# Altium PCB PS.PcbDoc
Units mil, origin at the board's own origin, x right, y up, seen from the top; angles counter-clockwise.
Board outline 4640 x 2100 mil, 2 copper layers (Top Layer, Bottom Layer), stack 21 mil thick; 80 components, 41 nets, 196 pads, 334 vias.
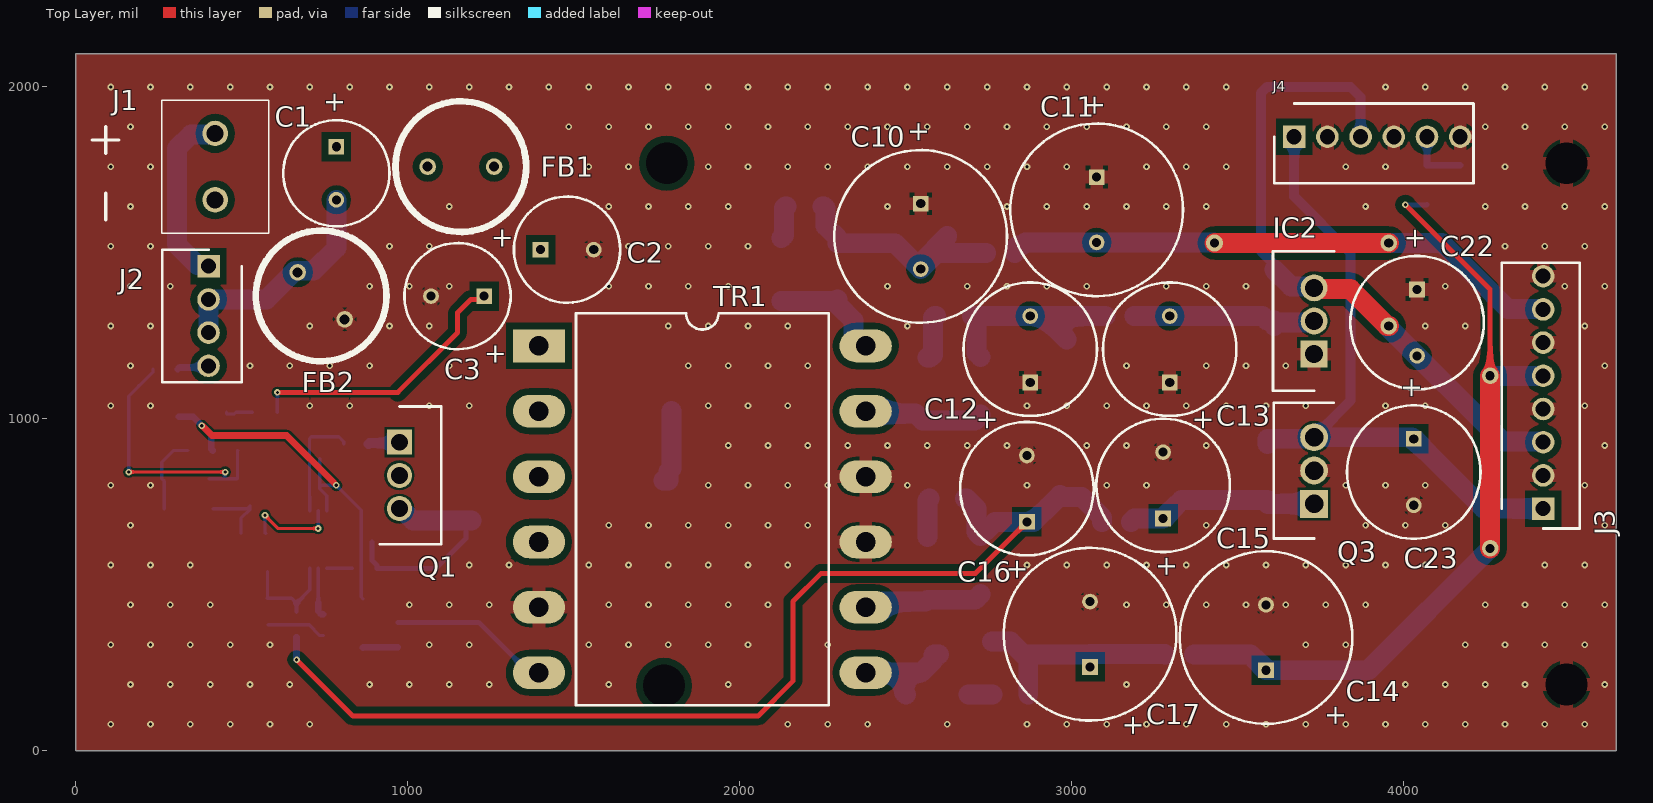
[diagram p0: Top Layer view]
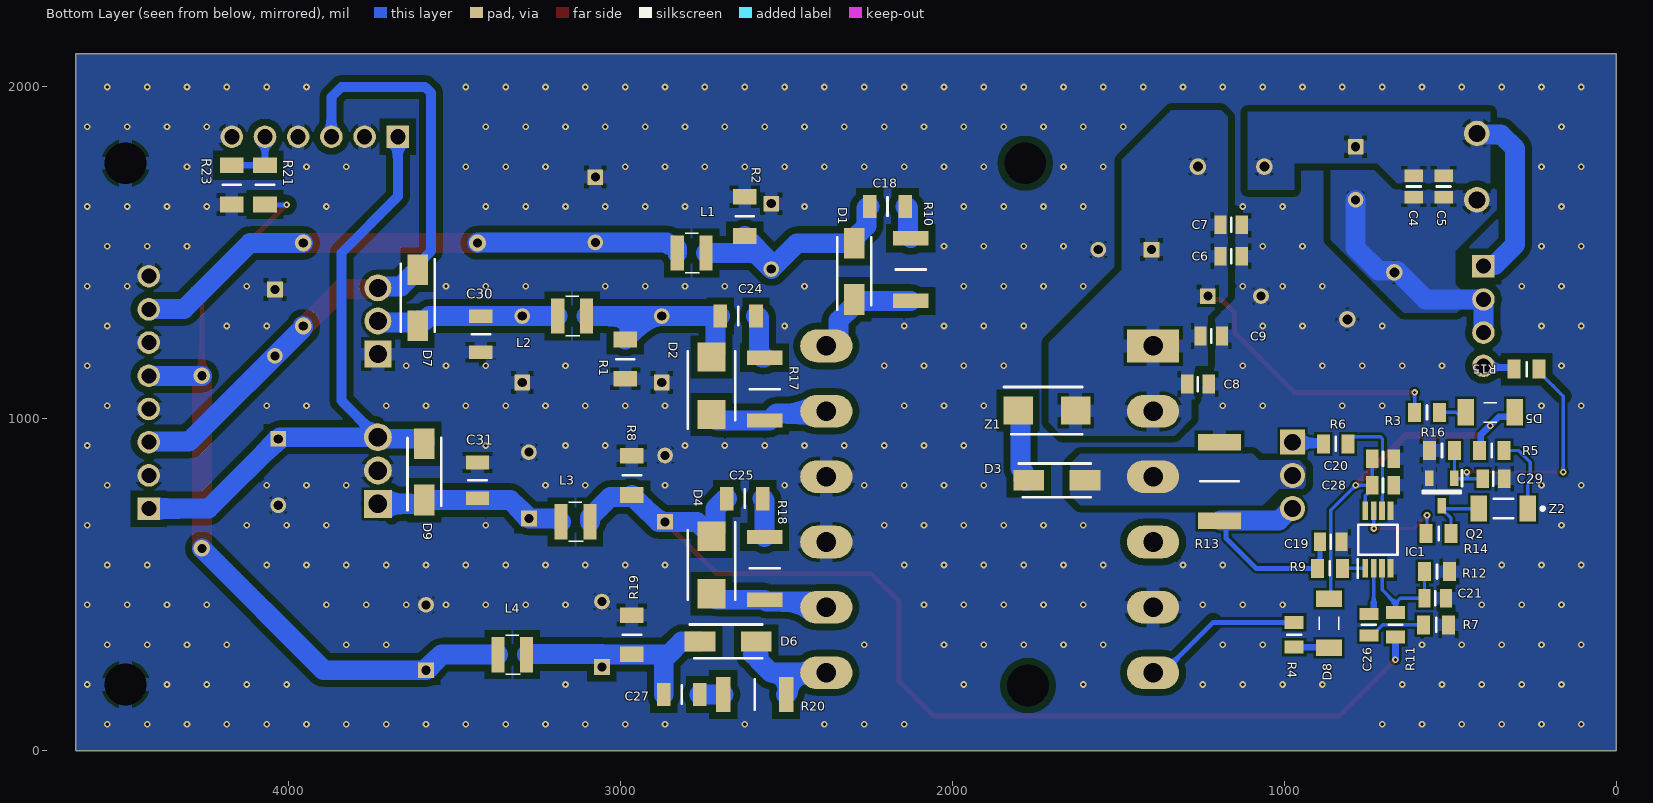
[diagram p1: Bottom Layer view, seen from below]
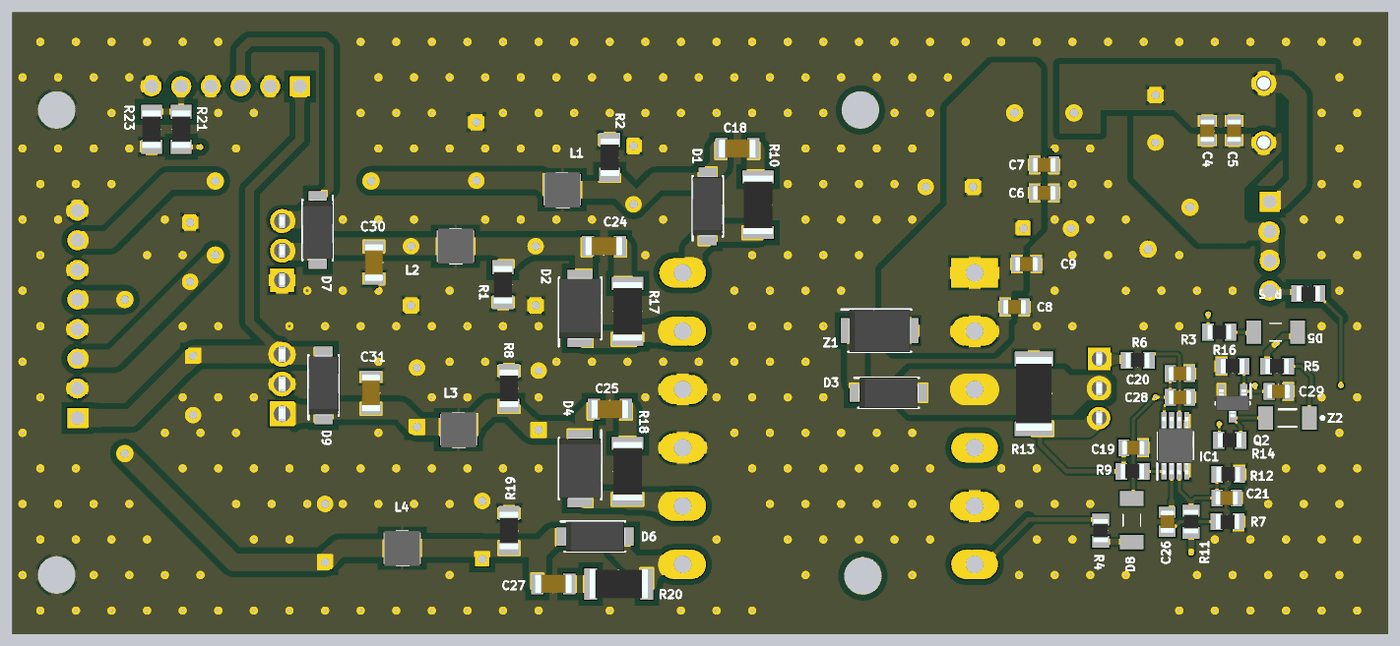
[diagram p2: 3D render of the assembled board from below, using the file's embedded part models]

## Layer stack, top to bottom
Top Solder: solder mask 0.4, Solder Resist, Dk 3.5
Top Layer: signal copper 1.4
Dielectric 2: prepreg 2.8, PP-006, Dk 4.1
Dielectric 1: dielectric 12.6, FR-4, Dk 4.8
Dielectric 3: prepreg 2.8, PP-006, Dk 4.1
Bottom Layer: signal copper 1.4
Bottom Solder: solder mask 0.4, Solder Resist, Dk 3.5

## Board outline
0,0 4640,0 4640,2100 0,2100

## Design rules (kind name [scope] priority, off if disabled: settings)
Clearance Clearance_1 [TouchesRoom('RoomIC1')OR(InComponent('IC2') OR InComponent('Q3'))] p1: gap=7 ignorepadtopadclearanceinfootprint=FALSE
Clearance Clearance_2 [WithinRoom('Room_control')] p2: gap=7 ignorepadtopadclearanceinfootprint=FALSE
Clearance [All] p3: gap=20 ignorepadtopadclearanceinfootprint=FALSE
ComponentClearance [All] p1: gap=0 collisioncheckmode=3 verticalgap=0 showdistances=FALSE
PolygonConnect SwitchNodePoly [InNet('NetD3_2')] p1: connectstyle=Direct reliefconductorwidth=40 reliefentries=4 polygonreliefangle="90 Angle" airgapwidth=10
PolygonConnect [All] p2: connectstyle=Relief reliefconductorwidth=40 reliefentries=4 polygonreliefangle="90 Angle" airgapwidth=10
RoomDefinition Room_control [InComponentClass('Components Class 1')] p1: confinementstyle=ConfineIn formatcopy=TRUE lockcomponents=FALSE outline 145,1135 185,1095 1190,1095 1305,980 1305,400 1050,145 255,145 75,325 75,1190 115,1230
RoomDefinition RoomIC1 [False] p2: confinementstyle=ConfineIn formatcopy=TRUE lockcomponents=FALSE outline 607.8,446.61 607.8,806.61 827.8,806.61 827.8,446.61
RoutingVias [All] p1: holewidth=10 width=20 viastyle="Through Hole" minholewidth=9.84 minwidth=19.68 maxholewidth=39.37 maxwidth=78.74
SolderMaskExpansion [All] p1: expansion=4 istentingtop=FALSE
Width W_Room [TouchesRoom('RoomIC1')] p1: maxlimit=10 minlimit=10 preferedwidth=10
Width [All] p2: maxlimit=100 minlimit=10 preferedwidth=20
29 further rules are at their usual default settings.

## Components (designator, comment, footprint, x,y, rotation, side; value= is the part's Value field where it differs from the comment)
C1 "CapPol" CapPol8mm 785,1740 r90 top value=10u
C2 "CapPol" CapPol8mm 1480,1510 r180 top value=10u
C3 "CapPol" CapPol8mm 1150,1370 r0 top value=10u
C4 "Capacitor_SMD" CAPC2012X140N 610,1700 r90 bottom value=4.7u
C5 "Capacitor_SMD" CAPC2012X140N 520,1700 r90 bottom value=4.7u
C6 "Capacitor_SMD" CAPC2012X140N 1160,1490 r0 bottom value=4.7u
C7 "Capacitor_SMD" CAPC2012X140N 1160,1585 r0 bottom value=4.7u
C8 "Capacitor_SMD" CAPC2012X140N 1260,1105 r0 bottom value=4.7u
C9 "Capacitor_SMD" CAPC2012X140N 1220,1250 r0 bottom value=4.7u
C10 "CapPol" Cap_pol_5x13 2545,1550 r90 top value=470u
C11 "CapPol" Cap_pol_5x13 3075,1630 r90 top value=470u
C12 "CapPol" CapPol_D10H16 2875,1210 r270 top value=470u
C13 "CapPol" CapPol_D10H16 3295,1210 r270 top value=470u
C14 "CapPol" Cap_pol_5x13 3585,341.57 r270 top value=470u
C15 "CapPol" CapPol_D10H16 3275,800 r270 top value=470u
C16 "CapPol" CapPol_D10H16 2865,790 r270 top value=470u
C17 "CapPol" Cap_pol_5x13 3055,351.57 r270 top value=470u
C18 "Capacitor_SMD" CAPC3216X95N 2195,1640 r180 bottom value=680n
C19 "Capacitor_SMD" CAPC2012X140N 860,630 r0 bottom value=100n
C20 "Capacitor_SMD" CAPC2012X140N 702.72,880 r0 bottom value=10u
C21 "Capacitor_SMD" CAPC2012X140N 545,460 r180 bottom value=100p
C22 "CapPol" CapPol_D10H16 4040,1290 r90 top value=10u
C23 "CapPol" CapPol_D10H16 4030,840 r90 top value=10u
C24 "Capacitor_SMD" CAPC3216X95N 2645,1310 r180 bottom value=680n
C25 "Capacitor_SMD" CAPC3216X95N 2625,760 r180 bottom value=680n
C26 "Capacitor_SMD" CAPC2012X140N 745,380 r90 bottom value=680n
C27 "Capacitor_SMD" CAPC3216X95N 2815,170 r0 bottom value=680n
C28 "Capacitor_SMD" CAPC2012X140N 702.72,800 r0 bottom value=100n
C29 "Capacitor_SMD" CAPC2012X140N 370,820 r0 bottom value=680n
C30 "Capacitor_SMD" CAPC3216X95N 3420,1255 r90 bottom value=4.7u
C31 "Capacitor_SMD" CAPC3216X95N 3430,815 r90 bottom value=4.7u
D1 "SS1200-LTP" DIOM5226X244N 2295,1444.65 r90 bottom
D2 "S2B-13-F" DIOM5336X250N 2725,1100 r90 bottom
D3 "SS1200-LTP" DIOM5226X244N 1685,815 r180 bottom
D4 "S2B-13-F" DIOM5336X250N 2725,560 r270 bottom
D5 "1N4148BUR" 1N4148BUR 380,1020 r0 bottom
D6 "SS1200-LTP" DIOM5226X244N 2675,330 r180 bottom
D7 "SS1200-LTP" DIOM5226X244N 3610,1365 r270 bottom
D8 "1N4148BUR" 1N4148BUR 865,385 r270 bottom
D9 "SS1200-LTP" DIOM5226X244N 3590,840.35 r90 bottom
FB1 "FR2" FB2 1060,1760 r0 top
FB2 "FR2" FB2 668.58,1441.42 r315 top
IC1 "LM3488MM_NOPB" SOP65P490X110-8N 717.8,636.61 r90 bottom
IC2 "KA7909TU" TO254P470X1016X2019-3P 3730,1195.2 r90 top
J1 "TB006-508-02BE" TB00650802BE 420,1760 r270 top
J2 "640456-4" SHDR4W66P0X254_1X4_1016X572X1041P 400,1460 r90 top
J3 "640456-8" SHDR8W66P0X254_1X8_2032X572X1024P 4420,730 r270 top
J4 "640456-6" SHDR6W66P0X254_1X6_1524X572X1003P 3670,1850 r180 top
L1 "Inductor" TYA3015150M 2785,1500 r90 bottom value=33uH
L2 "Inductor" TYA3015150M 3145,1310 r90 bottom value=33uH
L3 "Inductor" TYA3015150M 3135,690 r90 bottom value=33uH
L4 "Inductor" TYA3015150M 3325,290 r90 bottom value=33uH
Q1 "IRFZ44EPBF" TO254P469X1042X1967-3P 975,930 r270 top
Q2 "2N7002" SOT96P240X120-3N 525,780 r270 bottom
Q3 "L7809ACV" TO255P460X1020X2030-3P 3730,744.21 r90 top
R1 "Res_SMD" RESC3216X75N 2985,1180 r270 bottom value=1k
R2 "Res_SMD" RESC3216X75N 2625,1610 r90 bottom value=1k
R3 "Res_SMD" RESC2012X60N 570,1020 r0 bottom value=1k
R4 "Res_SMD" RESC2012X60N 970,350 r90 bottom value=1k
R5 "Res_SMD" RESC2012X60N 375,905 r0 bottom value=1k
R6 "Res_SMD" RESC2012X60N 845,925 r0 bottom value=1k
R7 "Res_SMD" RESC2012X60N 542.6,380 r0 bottom value=1k
R8 "Res_SMD" RESC3216X75N 2965,830 r270 bottom value=1k
R9 "Res_SMD" RESC2012X60N 862.4,550 r0 bottom value=1k
R10 "Res_SMD" RESC5025X65N 2125,1450 r270 bottom value=1k
R11 "Res_SMD" RESC2012X60N 665,380 r270 bottom value=1k
R12 "Res_SMD" RESC2012X60N 540,540 r0 bottom value=1k
R13 "Res_SMD" RESC6331X75N 1195,811.89 r270 bottom value=1k
R14 "Res_SMD" RESC2012X60N 535,655 r0 bottom value=1k
R15 "Res_SMD" RESC2012X60N 270,1150 r180 bottom value=1k
R16 "Res_SMD" RESC2012X60N 525,905 r180 bottom value=1k
R17 "Res_SMD" RESC5025X65N 2565,1090 r270 bottom value=1k
R18 "Res_SMD" RESC5025X65N 2565,550 r270 bottom value=1k
R19 "Res_SMD" RESC3216X75N 2965,350 r270 bottom value=1k
R20 "Res_SMD" RESC5025X65N 2595,170 r180 bottom value=1k
R21 "Res_SMD" RESC3216X75N 4070,1705 r270 bottom value=1k
R23 "Res_SMD" RESC3216X75N 4170,1705 r270 bottom value=1k
TR1 "Transformer 12pin30.15.7" TRAFO5MMX25MM12PCS 1395,1220 r0 top
Z1 "1SMB5932BT3G" DIOM5436X247N 1715,1025 r180 bottom
Z2 "Zener" SOD-80 340,730 r0 bottom value=6.8

## Footprints (in the part's own frame and the unit in brackets; to place one, negate y for a bottom-side part, rotate by r counter-clockwise, add the part's x,y. Pads: shape width x height; smd on the part's side, far side on the other; paste and mask are expansions set on the pad)
1N4148BUR [mm]
  rect 1.25x2 smd: 1(-1.875,0) 2(1.875,0)
  silkscreen extent -0.5,-0.75 0.5,0.75
Cap_pol_5x13 [mm] "polarized electrolytic capacitor with 5mm legs spacing"
  rect 1.2x1.2 hole 0.7: 1(2.5,0)
  round 1.2 hole 0.7: 2(-2.5,0)
  silkscreen extent -6.6,-6.6 6.6,6.6
CAPC2012X140N [mm]
  rect 0.94x1.43 smd: 1(-0.82,0) 2(0.82,0)
  silkscreen extent 0,-0.53 0,0.53, body extent -1,-0.63 1,0.63, height 1.4
CAPC3216X95N [mm]
  rect 1.04x1.78 smd: 1(-1.37,0) 2(1.37,0)
  silkscreen extent 0,-0.7 0,0.7, body extent -1.6,-0.8 1.6,0.8, height 0.95
CapPol8mm [mm] "4mm pin spacing 8mm diameter"
  rect 1.2x1.2 hole 0.7: 1(2.032,0)
  round 1.2 hole 0.7: 2(-2.032,0)
  silkscreen extent -4.06,-4.06 4.06,4.06
CapPol_D10H16 [mm] "THT capacitor electrolytic"
  rect 1.2x1.2 hole 0.7: 1(2.54,0)
  round 1.2 hole 0.7: 2(-2.54,0)
  silkscreen extent -5.1,-5.11 5.1,5.11
DIOM5226X244N [mm]
  rect 2.35x1.55 smd: 1(-2.15,0) 2(2.15,0)
  silkscreen extent -2.93,-1.29 2.6,1.29, body extent -2.6,-1.29 2.6,1.29, height 2.44
DIOM5336X250N [mm]
  rect 2.25x2.15 smd: 1(-2.2,0) 2(2.2,0)
  silkscreen extent -3.27,-1.81 2.65,1.81, body extent -2.65,-1.81 2.65,1.81, height 2.5
DIOM5436X247N [mm]
  rect 2.25x2.15 smd: 1(-2.2,0) 2(2.2,0)
  silkscreen extent -3.27,-1.81 2.7,1.81, body extent -2.7,-1.81 2.7,1.81, height 2.47
FB2 [mil]
  round 50 hole 30: 1(0,0) 2(200,0)
  silkscreen extent -97,-197 297,197
RESC2012X60N [mm]
  rect 1x1.45 smd: 1(-0.95,0) 2(0.95,0)
  silkscreen extent 0,-0.53 0,0.53, body extent -1,-0.63 1,0.63, height 0.6
RESC3216X75N [mm]
  rect 1.2x1.8 smd: 1(-1.5,0) 2(1.5,0)
  silkscreen extent 0,-0.7 0,0.7, body extent -1.6,-0.8 1.6,0.8, height 0.75
RESC5025X65N [mm]
  rect 1.1x2.7 smd: 1(-2.4,0) 2(2.4,0)
  silkscreen extent 0,-1.15 0,1.15, body extent -2.5,-1.25 2.5,1.25, height 0.65
RESC6331X75N [mm]
  rect 1.25x3.3 smd: 1(-3,0) 2(3,0)
  silkscreen extent 0,-1.45 0,1.45, body extent -3.15,-1.55 3.15,1.55, height 0.75
SHDR4W66P0X254_1X4_1016X572X1041P [mm]
  rect 1.725x1.725 hole 1.15: 1(0,0)
  round 1.725 hole 1.15: 2(-2.54,0) 3(-5.08,0) 4(-7.62,0)
  silkscreen extent -8.89,-2.54 1.27,3.56, body extent -8.86,-2.7 1.3,3.14, height 10.03
SHDR6W66P0X254_1X6_1524X572X1003P [mm]
  rect 1.725x1.725 hole 1.15: 1(0,0)
  round 1.725 hole 1.15: 2(-2.54,0) 3(-5.08,0) 4(-7.62,0) 5(-10.16,0) 6(-12.7,0)
  silkscreen extent -13.72,-2.54 1.52,3.56, body extent -13.98,-2.76 1.26,3.08, height 10.03
SHDR8W66P0X254_1X8_2032X572X1024P [mm]
  rect 1.725x1.725 hole 1.15: 1(0,0)
  round 1.725 hole 1.15: 2(-2.54,0) 3(-5.08,0) 4(-7.62,0) 5(-10.16,0) 6(-12.7,0) 7(-15.24,0) 8(-17.78,0)
  silkscreen extent -18.8,-3.17 1.52,2.8, body extent -19.03,-2.65 1.29,3.19, height 10.03
SOD-80 [mm]
  rect 1.25x2 smd: 1(-1.875,0) 2(1.875,0)
  silkscreen extent -3.12,-0.75 0.75,0.75
SOP65P490X110-8N [mm]
  rect 1.4x0.45 smd: 1(-2.2,0.975) 2(-2.2,0.325) 3(-2.2,-0.325) 4(-2.2,-0.975) 5(2.2,-0.975) 6(2.2,-0.325) 7(2.2,0.325) 8(2.2,0.975)
  silkscreen extent -2.9,-1.5 1.15,1.55, body extent -2.45,-1.5 2.45,1.5, height 1.1
SOT96P240X120-3N [mm]
  rect 1.2x0.65 smd: 1(-1.05,0.96) 2(-1.05,-0.96) 3(1.05,0)
  silkscreen extent -1.65,-1.45 0.1,1.54, body extent -1.2,-1.45 1.2,1.45, height 1.2
TB00650802BE [mm]
  round 1.95 hole 1.3: 1(-2.54,0) 2(2.54,0)
  silkscreen extent -5.08,-4.1 5.08,4.1, body extent -5.08,-4.1 5.08,4.1, height 10.5
TO254P469X1042X1967-3P [mm]
  rect 1.92x1.92 hole 1.28: 1(0,0)
  round 1.92 hole 1.28: 2(2.54,0) 3(5.08,0)
  silkscreen extent -2.73,-1.5 7.81,3.19, body extent -2.67,-1.5 7.75,3.19, height 18.84
TO254P470X1016X2019-3P [mm]
  rect 2.055x2.055 hole 1.37: 1(0,0)
  round 2.055 hole 1.37: 2(2.535,0) 3(5.07,0)
  silkscreen extent -2.8,-1.55 7.87,3.15, body extent -2.55,-1.55 7.61,3.15, height 18.54
TO255P460X1020X2030-3P [mm]
  rect 2.13x2.13 hole 1.42: 1(0,0)
  round 2.13 hole 1.42: 2(2.55,0) 3(5.1,0)
  silkscreen extent -2.65,-1.5 7.75,3.1, body extent -2.55,-1.5 7.65,3.1, height 19.4
TRAFO5MMX25MM12PCS [mm]
  rect 4x2.5 hole 1.5: 1(0,0)
  oval 4x2.5 hole 1.5: 2(0,-5) 3(0,-10) 4(0,-15) 5(0,-20) 6(0,-25) 7(25,-25) 8(25,-20) 9(25,-15) 10(25,-10) 11(25,-5) 12(25,0)
  silkscreen extent 2.83,-27.5 22.17,2.5
TYA3015150M [mm]
  rect 2.7x1 smd: 1(0,-1.1) 2(0,1.1)
  silkscreen extent -1.5,-0.6 1.5,0.5, body extent -1.5,-1.5 1.5,1.5, height 1.4

## Part data
C1 C2 C3 C10 C11 C12 C13 C14 C15 C16 C17 C22 C23: "Capacitor polarized electrolytic", Manufacturer_Name=TDK, Manufacturer_Part_Number=B43640A9477M, Mouser Part Number=871-B43640A9477M, Datasheet Link=https://componentsearchengine.com/Datasheets/1/B43640A9477M.pdf, Height=52mm
C4 C5 C6 C7 C8 C9 C18 C19 C20 C21 C24 C25 C26 C27 C28 C29 C30 C31: "Capacitor smd ceramic", Manufacturer_Name=TDK, Manufacturer_Part_Number=C3216C0G1H562J060AA, Datasheet Link=https://product.tdk.com/info/en/catalog/datasheets/mlcc_commercial_midvoltage_en.pdf, Height=0.75mm
D1 D3 D6 D7 D9: "Diode", Manufacturer_Name="Micro Commercial Components (MCC)", Mouser Part Number=833-SS1200-LTP, Arrow Part Number=SS1200-LTP, Arrow Price/Stock=https://www.arrow.com/en/products/ss1200-ltp/micro-commercial-components, Datasheet Link=http://www.mouser.com/ds/2/258/SS1150-L-SS1200-L(DO-214AC)-272760.pdf, Height=2.44mm, Manufacturer_Part_Number=SS1200-LTP, Mouser Price/Stock=https://www.mouser.co.uk/ProductDetail/Micro-Commercial-Components-MCC/SS1200-LTP?qs=O1HRStiETChHpHSSFKYx%252Bg%3D%3D
D2 D4: "Diode", Manufacturer_Name="Diodes Inc.", Mouser Part Number=621-S2B-F, Arrow Part Number=S2B-13-F, Arrow Price/Stock=https://www.arrow.com/en/products/s2b-13-f/diodes-incorporated, Datasheet Link=https://www.diodes.com/assets/Datasheets/ds16004.pdf, Height=2.5mm, Manufacturer_Part_Number=S2B-13-F, Mouser Price/Stock=https://www.mouser.com/Search/Refine.aspx?Keyword=621-S2B-F
D5 D8: "Diode", Manufacturer_Name=Vishay, Datasheet Link=https://www.mouser.com/datasheet/2/427/ll4148-1767723.pdf, Height=1.6mm, Manufacturer_Part_Number=1N4148BUR
FB1 FB2: "THT ferrite bead"
IC1: "Integrated Circuit", Arrow Part Number=LM3488MM/NOPB, Manufacturer_Name="Texas Instruments", Mouser Part Number=926-LM3488MM/NOPB, Arrow Price/Stock=https://www.arrow.com/en/products/lm3488mmnopb/texas-instruments, Datasheet Link=https://www.ti.com/lit/ds/symlink/lm3488.pdf?HQS=TI-null-null-mousermode-df-pf-null-wwe&ts=1601467154043&ref_url=https%253A%252F%252Fwww.mouser.in%252F, Height=1.1mm, Manufacturer_Part_Number=LM3488MM/NOPB, Mouser Price/Stock=https://www.mouser.co.uk/ProductDetail/Texas-Instruments/LM3488MM-NOPB?qs=X1J7HmVL2ZHi%252BCD2w7rKZg%3D%3D
IC2: "Integrated Circuit", Manufacturer_Name="ON Semiconductor", Mouser Part Number=512-KA7909TU, Datasheet Link=https://docs-emea.rs-online.com/webdocs/14a6/0900766b814a6786.pdf, Height=4.7mm, Manufacturer_Part_Number=KA7909TU, Mouser Price/Stock=https://www.mouser.com/Search/Refine.aspx?Keyword=512-KA7909TU
J1: "Connector", Manufacturer_Name="CUI Devices", Mouser Part Number=490-TB006-508-02BE, Arrow Part Number=TB006-508-02BE, Arrow Price/Stock=https://www.arrow.com/en/products/tb006-508-02be/cui-devices, Datasheet Link=https://www.mouser.com/datasheet/2/670/tb006-508-1550645.pdf, Height=10.4mm, Manufacturer_Part_Number=TB006-508-02BE, Mouser Price/Stock=https://www.mouser.co.uk/ProductDetail/CUI-Devices/TB006-508-02BE?qs=vLWxofP3U2wEdOVV%2FaT04w%3D%3D
J2: "Connector", Manufacturer_Name="TE Connectivity", Mouser Part Number=571-6404564, Arrow Part Number=640456-4, Arrow Price/Stock=https://www.arrow.com/en/products/640456-4/te-connectivity, Datasheet Link=http://www.te.com/commerce/DocumentDelivery/DDEController?Action=showdoc&DocId=Customer+Drawing%7F640456%7FW3%7Fpdf%7FEnglish%7FENG_CD_640456_W3.pdf%7F640456-4, Height=10.414mm, Manufacturer_Part_Number=640456-4, Mouser Price/Stock=https://www.mouser.co.uk/ProductDetail/TE-Connectivity-AMP/640456-4?qs=%2F35zJ5USjokX5rl%252BbVBc4g%3D%3D, System=Connector
J3: "Connector", Manufacturer_Name="TE Connectivity", Mouser Part Number=571-6404568, Arrow Part Number=640456-8, Arrow Price/Stock=https://www.arrow.com/en/products/640456-8/te-connectivity, Datasheet Link=http://docs-emea.rs-online.com/webdocs/13e2/0900766b813e2516.pdf, Height=10.236mm, Manufacturer_Part_Number=640456-8, Mouser Price/Stock=https://www.mouser.co.uk/ProductDetail/TE-Connectivity-AMP/640456-8?qs=%2F35zJ5USjomho1287DA4QA%3D%3D, System=Connector
J4: "Connector", Manufacturer_Name="TE Connectivity", Mouser Part Number=571-6404566, Arrow Part Number=640456-6, Arrow Price/Stock=https://www.arrow.com/en/products/640456-6/te-connectivity, Datasheet Link=https://www.mouser.com/ProductDetail/TE-Connectivity/640456-6?qs=%2F35zJ5USjomb%252bGgX%252bBnrrQ%3D%3D&gclid=CjwKCAjwkoz7BRBPEiwAeKw3q0mcLif-2aBBbbX-TwuIeMidB_ARULgbAE-SJPQzeNro84r-4lxoHhoCr1IQAvD_BwE, Height=10.033mm, Manufacturer_Part_Number=640456-6, Mouser Price/Stock=https://www.mouser.co.uk/ProductDetail/TE-Connectivity-AMP/640456-6?qs=%2F35zJ5USjomb%252BGgX%252BBnrrQ%3D%3D, System=Connector
Q1: "MOSFET (N-Channel)", Manufacturer_Name=Infineon, Mouser Part Number=942-IRFZ44EPBF, Arrow Part Number=IRFZ44EPBF, Arrow Price/Stock=https://www.arrow.com/en/products/irfz44epbf/infineon-technologies-ag, Datasheet Link=https://componentsearchengine.com/Datasheets/2/IRFZ44EPBF.pdf, Height=4.69mm, Manufacturer_Part_Number=IRFZ44EPBF, Mouser Price/Stock=https://www.mouser.co.uk/ProductDetail/Infineon-IR/IRFZ44EPBF?qs=9%252BKlkBgLFf00d8QrWy3wMA%3D%3D
Q2: "MOSFET (N-Channel)", Manufacturer_Name=Vishay, Mouser Part Number=781-2N7002, Datasheet Link=https://www.diodes.com/assets/Datasheets/ds11303.pdf, Height=1.2mm, Manufacturer_Part_Number=2N7002, Mouser Price/Stock=https://www.mouser.co.uk/ProductDetail/Vishay-Siliconix/2N7002?qs=xBpwZ0JX2zKeuvZKtdYLZQ%3D%3D
Q3: "Transistor", Manufacturer_Name=STMicroelectronics, Mouser Part Number=511-L7809ACV, Datasheet Link=https://componentsearchengine.com/Datasheets/1/L7809ACV.pdf, Height=4.6mm, Manufacturer_Part_Number=L7809ACV, Mouser Price/Stock=https://www.mouser.co.uk/ProductDetail/STMicroelectronics/L7809ACV/?qs=arR7071FstcIsO2ME7JR7Q%3D%3D
R1 R2 R3 R4 R5 R6 R7 R8 R9 R10 R11 R12 R13 R14 R15 R16 R17 R18 R19 R20 R21 R23: "Resistor SMD", Arrow Part Number=CR1206-FW-1504ELF, Manufacturer_Name=Bourns, Mouser Part Number=652-CR1206FW1504ELF, Arrow Price/Stock=https://www.arrow.com/en/products/cr1206-fw-1504elf/bourns, Datasheet Link=http://componentsearchengine.com/Datasheets/1/CR1206-FW-1504ELF.pdf, Height=0.75mm, Manufacturer_Part_Number=CR1206-FW-1504ELF, Mouser Price/Stock=https://www.mouser.co.uk/ProductDetail/Bourns/CR1206-FW-1504ELF/?qs=6oMev5NRZMFfvXkOpYL2%252BA%3D%3D
TR1: "Transformer EE 30x15x7 WxHxL 12pin"
Z1: "Zener Diode", Manufacturer_Name="ON Semiconductor", Mouser Part Number=863-1SMB5932BT3G, Arrow Part Number=1SMB5932BT3G, Arrow Price/Stock=https://www.arrow.com/en/products/1smb5932bt3g/on-semiconductor, Datasheet Link=http://www.onsemi.com/pub/Collateral/1SMB5913BT3-D.PDF, Height=2.47mm, Manufacturer_Part_Number=1SMB5932BT3G, Mouser Price/Stock=https://www.mouser.co.uk/ProductDetail/ON-Semiconductor/1SMB5932BT3G?qs=vLkC5FC1VN%2Fm4oZo18auNg%3D%3D
Z2: "Zener Diode", Manufacturer_Name=Vishay, Manufacturer_Part_Number=GLL4739-E3/97, Mouser Part Number=78-GLL4739-E3/97, Datasheet Link=https://hu.mouser.com/datasheet/2/427/gll4735-1767862.pdf, Height=2.67mm, Mouser Price/Stock=https://www.mouser.com/Search/Refine.aspx?Keyword=78-GLL4739-E3%2F97
L1 L2 L3 L4: Code_IEC=1005, Code_JEITA=0402, LatestRevisionDate=29-May-2009, LatestRevisionNote="IPC-7351 Footprint Added.", PackageDescription="Chip Inductor", PackageReference=0402-A, Published=8-Jun-2000, Publisher="Altium Limited"

## Free pads (board coordinates)
  round 0 hole 125.98: 2(1780,1770) 3(1771.65,196.85) 5(4490,200) 5(4490,1770)

## Via types
v1: diameter 20, hole 10, Top Layer to Bottom Layer, 324 vias
v2: diameter 50, hole 28, Top Layer to Bottom Layer, 5 vias
v3: diameter 19.68, hole 9.84, Top Layer to Bottom Layer, 5 vias

## Nets (pads, with @x,y where several pads share a name; then routed paths per layer and width w, separated by ;. In a path a pad name is that pad's centre, name@x,y a point inside that pad or via, vN(x,y) a via of type N, cw(c..) or ccw(c..) an arc to the next point about the centre after c; other vN are vias at no path point)
GND: C2.2 C3.2 C6.1 C7.1 C8.1 C9.1 C10.1 C11.1 C12.1 C13.1 C14.2 C15.2 C16.2 C17.2 C19.1 C20.1 C21.2 C22.1 C23.2 C28.1 C29.1 C30.1 C31.2 FB2.2 IC1.4 IC1.5 IC2.1 J3.2 J3.4 J3.6 J3.8 J4.2 J4.4 J4.6 pad.5 Q2.2 Q3.2 R1.2 R2.2 R7.1 R8.1 R12.1 R13.1 R16.1 R19.1 R23.2 TR1.5 TR1.9 TR1.10
  other v1: 105,80 225,80 345,80 465,80 585,80 705,80 2145,80 2265,80 2385,80 2625,80 2865,80 2985,80 3105,80 3225,80 3345,80 3465,80 3585,80 3705,80 3825,80 3945,80 4065,80 4185,80 4305,80 4425,80 4545,80 165,200 285,200 405,200 525,200 645,200 885,200 1005,200 1125,200 1245,200 1605,200 1965,200 3165,200 4005,200 4125,200 4245,200 4365,200 4605,200 105,320 225,320 345,320 465,320 585,320 1065,320 1185,320 1545,320 1665,320 1785,320 1905,320 2025,320 2265,320 3705,320 3825,320 4185,320 4305,320 4425,320 4545,320 165,440 285,440 405,440 1005,440 1125,440 1245,440 1605,440 1725,440 1845,440 1965,440 2085,440 3165,440 3285,440 3405,440 3525,440 3645,440 3765,440 3885,440 4245,440 4365,440 4485,440 4605,440 105,560 225,560 345,560 1185,560 1305,560 1545,560 1665,560 1785,560 1905,560 2025,560 2145,560 2865,560 2985,560 3105,560 3225,560 3345,560 3465,560 3585,560 3705,560 3825,560 3945,560 4065,560 4425,560 4545,560 165,680 1605,680 1725,680 1845,680 1965,680 2085,680 2205,680 3405,680 3885,680 4005,680 4125,680 4605,680 105,800 225,800 1905,800 2025,800 2145,800 2265,800 2505,800 2865,800 3105,800 3225,800 3825,800 3945,800 4065,800 4545,800 1965,920 2085,920 2205,920 2325,920 2445,920 2565,920 2685,920 2805,920 3045,920 3165,920 3405,920 4605,920 105,1040 225,1040 705,1040 825,1040 1065,1040 1185,1040 1905,1040 2025,1040 2145,1040 2865,1040 2985,1040 3105,1040 3225,1040 3345,1040 3465,1040 3585,1040 3705,1040 3945,1040 4065,1040 4545,1040 165,1160 525,1160 645,1160 765,1160 885,1160 1125,1160 1845,1160 1965,1160 2085,1160 2205,1160 3165,1160 3405,1160 3525,1160 3645,1160 4605,1160 105,1280 225,1280 705,1280 945,1280 1065,1280 1785,1280 1905,1280 2025,1280 2145,1280 2505,1280 4065,1280 4185,1280 4545,1280 165,1400 285,1400 885,1400 1005,1400 1125,1400 1605,1400 1725,1400 1845,1400 1965,1400 2445,1400 2685,1400 2805,1400 2925,1400 3045,1400 3285,1400 3405,1400 3525,1400 4125,1400 4485,1400 4605,1400 105,1520 225,1520 945,1520 1065,1520 1665,1520 1785,1520 1905,1520 2025,1520 4305,1520 4425,1520 4545,1520 165,1640 1005,1640 1125,1640 1605,1640 1725,1640 1845,1640 1965,1640 2445,1640 2805,1640 2925,1640 3045,1640 3165,1640 3285,1640 3405,1640 3885,1640 4245,1640 4365,1640 4485,1640 4605,1640 105,1760 225,1760 1545,1760 1665,1760 1905,1760 2025,1760 2145,1760 2265,1760 2385,1760 2505,1760 2625,1760 2745,1760 2865,1760 2985,1760 3225,1760 3345,1760 3465,1760 3825,1760 3945,1760 4305,1760 165,1880 1485,1880 1605,1880 1725,1880 1845,1880 1965,1880 2085,1880 2205,1880 2325,1880 2445,1880 2565,1880 2685,1880 2805,1880 2925,1880 3045,1880 3165,1880 3285,1880 3405,1880 4245,1880 4365,1880 4485,1880 4605,1880 105,2000 225,2000 345,2000 465,2000 585,2000 705,2000 825,2000 945,2000 1065,2000 1185,2000 1305,2000 1425,2000 1545,2000 1665,2000 1785,2000 1905,2000 2025,2000 2145,2000 2265,2000 2385,2000 2505,2000 2625,2000 2745,2000 2865,2000 2985,2000 3105,2000 3225,2000 3345,2000 3465,2000 3945,2000 4065,2000 4185,2000 4305,2000 4425,2000 4545,2000
NetC1_1: C1.1 C4.2 C5.2 FB1.1 J1.1 J2.1 | length 545.4
  Bottom Layer w60: J2.1 396.04,1463.96 366.04,1463.96 305.15,1524.85 305.15,1815.15 346.79,1856.79 416.79,1856.79 J1.1
NetC1_2: C1.2 C4.1 C5.1 FB2.1 J1.2 J2.2 J2.3 | length 694.2
  Bottom Layer w60: J2.3 J2.2 573.93,1360 660.3,1446.37 668.58,1446.37 716.37,1446.37 785,1515 C1.2
NetC10_2: C10.2 C18.1 D1.2 L1.1 R2.1 | length 763.9
  Bottom Layer w60: C18.1 2253.43,1640 2258.46,1634.96 2258.46,1581.57 2295,1545.04 D1.2 2467.28,1529.29 C10.2 ; R2.1 2625,1550 2545,1470 C10.2 ; L1.1 2593.43,1500 C10.2
NetC12_2: C12.2 C24.1 D2.2 L2.1 R1.1 | length 635
  Bottom Layer w60: C24.1 C24.1@2703.43,1310 ; D2.2 2712.68,1198.94 2712.68,1300.75 C24.1@2703.43,1310 ; R1.1 2985,1240 2915,1310 ; L2.1 2915,1310 ; C24.1@2703.43,1310 C12.2 2915,1310
NetC17_1: C17.1 C27.2 D6.1 L4.1 R19.2 | length 667
  Bottom Layer w60: D6.1 2760.16,329.49 2815.51,329.49 2855,290 ; C27.2 2868.94,276.06 2855,290 ; R19.2 R19.2@2965.94,290 ; L4.1 3280.12,291.57 3055,291.57 3053.43,290 R19.2@2965.94,290 ; 2855,290 R19.2@2965.94,290
NetC18_2: C18.2 R10.1 | length 103.9
  Bottom Layer w60: R10.1 2133.03,1552.52 2133.03,1634.96 2138.07,1640 C18.2
NetC19_2: C19.2 Q1.3 R9.2 R13.2 | length 687
  Bottom Layer w15: C19.2 892.28,573.98 907.4,558.86 907.4,550 1085,550 1175,640 1175,676.67 1192.11,693.78 R13.2
  Bottom Layer w60: Q1.3 979.22,730 1015.44,693.78 R13.2@1192.11,693.78
NetC21_1: C21.1 IC1.3 R11.1 R12.2 | length 323.1
  Bottom Layer w10: R12.2 577.4,460.12 C21.1 607.8,460 650,460 663.39,446.61 665,445 R11.1 ; 666.61,446.61 705,485 IC1.3
  Bottom Layer w20: 665,445 666.61,446.61
NetC24_2: C24.2 R17.1 | length 143.7
  Bottom Layer w60: R17.1 2573.19,1184.49 2581.54,1192.83 2581.54,1304.96 2586.57,1310 C24.2
NetC25_2: C25.2 R18.1 | length 118.6
  Bottom Layer w60: R18.1 2565,754.96 2570.04,760 C25.2
NetC26_1: C26.1 R7.2 | length 178.4
  Bottom Layer w10: R7.2 703.07,380 735.35,347.72 C26.1
NetC26_2: C26.2 IC1.2 | length 147.1
  Bottom Layer w10: 730.59,446.61 IC1.2
  Bottom Layer w20: 730.59,446.61 730.59,420.79 739.09,412.28 C26.2
NetC27_1: C27.1 R20.1 | length 71.6
  Bottom Layer w60: R20.1 C27.1
NetC29_2: C29.2 Q2.1 R15.2 R16.2 | length 823.3
  Top Layer w10: v1(160,840) v1(450,840)
  Bottom Layer w10: v1(160,840) 160,1068.54 190,1098.54 ; 190,1100 190,1098.54 ; R15.2 232.6,1141.14 190,1098.54 ; C29.2 444.07,820 ; v1(450,840) 448.09,838.09 448.09,824.01 444.07,820 ; R16.2 487.2,904.61 Q2.1 485.87,820 444.07,820
NetD1_1: D1.1 R10.2 TR1.12 | length 356.3
  Bottom Layer w60: R10.2 2294.49,1355.51 D1.1@2295,1356.02 ; D1.1 D1.1@2295,1356.02 ; TR1.12 2360.12,1220 2342.37,1237.75 2342.37,1296.88 2295,1344.25 D1.1@2295,1356.02
NetD2_1: D2.1 R17.2 TR1.11 | length 365.9
  Bottom Layer w60: TR1.11@2379.37,1023.27 TR1.11 2386.6,1015.8 2529.91,1015.8 2550.2,995.51 R17.2 2709.09,995.51 2725,1011.42 D2.1
NetD3_1: D3.1 Z1.1 | length 228.3
  Bottom Layer w60: D3.1 1785.39,815 1785.91,815.51 1785.91,841.56 1795,850.66 Z1.1@1795,1023.54
NetD3_2: D3.2 Q1.2 TR1.3
NetD4_2: D4.2 R18.2 TR1.8 | length 363.8
  Bottom Layer w60: TR1.8 2386.6,439.95 2443.3,439.95 2453.35,450 2559.49,450 R18.2 2709.09,455.51 2725,471.42 D4.2
NetD5_2: D5.2 R3.1 | length 85.9
  Bottom Layer w10: D5.2 453.82,1015 478.17,1015 483.17,1020 R3.1
NetD6_2: D6.2 R20.2 TR1.7 | length 320.8
  Bottom Layer w60: TR1.7 2495,235.75 ; R20.2 2495,175.51 2495,235.75 ; 2600.35,290 2584.61,290 2584.09,289.49 2584.09,273.74 2546.1,235.75 2495,235.75
NetD8_2: D8.2 R4.1 | length 105.6
  Bottom Layer w20: D8.2 865.71,311.89 969.29,311.89 R4.1
NetIC1_1: IC1.1 R9.1 | length 76.4
  Bottom Layer w10: IC1.1 R9.1@832.6,550
NetIC1_6: IC1.6 R6.1 | length 336.4
  Bottom Layer w10: IC1.6 705,766.38 704.14,767.23 704.14,806.61 704.14,940.57 710,946.43 792.91,946.43 807.6,931.74 R6.1
NetIC1_7: IC1.7 R14.2 | length 286
  Top Layer w10: v3(570,710) 610,670 v3(730,670)
  Bottom Layer w10: v3(570,710) 570,657.4 R14.2 ; v3(730,670) 730.3,670.3 730.3,722.93 IC1.7
NetJ2_4: J2.4 R15.1 | length 96.7
  Bottom Layer w20: R15.1 312.4,1155 395,1155 J2.4
NetJ4_5: J4.5 R21.1 R23.1 | length 185.9
  Bottom Layer w20: J4.5 R21.1 R23.1
NetQ1_1: Q1.1 R6.2 | length 94.7
  Bottom Layer w30: R6.2 884.9,927.5 972.5,927.5 Q1.1
NetQ2_3: Q2.3 R14.1 Z2.2 | length 209.4
  Bottom Layer w10: Z2.2 517.2,730 Q2.3@525,737.8 ; R14.1 497.6,700.43 525,727.83 Q2.3@525,737.8 ; Q2.3 Q2.3@525,737.8
NetR4_2: R4.2 TR1.6 | length 487.8
  Bottom Layer w15: R4.2 1213.82,387.4 1365.47,235.75 TR1.6
NetR5_1: R5.1 Z2.1 | length 235.4
  Bottom Layer w10: Z2.1 266.18,813.24 259.14,820.28 259.14,869.14 295,905 R5.1
V9+: C23.1 D9.2 J3.1 J4.1 Q3.3 | length 1957.1
  Bottom Layer w30: J4.1 3670,1670 3840,1500 3840,1055 Q3.3
  Bottom Layer w60: D9.2 3590,939.92 3590.51,940.43 3725.44,940.43 Q3.3 4025,945 C23.1 4240,730 J3.1
V9-: C22.2 D7.1 IC2.3 J3.3 J4.3 | length 2019.6
  Top Layer w60: IC2.3 3734,1390.8 3839.2,1390.8 3950,1280 v2(3955,1280)
  Bottom Layer w30: D7.1 3610,1465.39 3570,1505.39 3570,1982.43 3587.57,2000 3840,2000 3870,1970 J4.3
  Bottom Layer w60: D7.1 3660.84,1398.8 IC2.3@3734,1398.8 ; v2(3955,1280) 3955,1275 4298.49,931.51 4418.49,931.51 J3.3
V12+: C15.1 C31.1 D9.1 L3.2 Q3.1 | length 589.8
  Bottom Layer w60: L3.2 3188.31,700 C15.1 3330.71,755.71 3589.49,755.71 3590,755.2 3590,744.72 3590.51,744.21 Q3.1
V12+_prefilter: C16.1 C25.1 D4.1 L3.1 R8.2 R11.2 | length 3316.6
  Top Layer w15: v3(665,275) 835,105 2055,105 2160,210 2160,450 2245,535 2710,535 C16.1
  Bottom Layer w20: v3(665,275) R11.2
  Bottom Layer w60: C25.1 2683.43,760 2712.68,730.75 2712.68,658.94 D4.1 2725,648.58 2737.32,660.91 2739.29,660.91 2768.39,690 C16.1 2885,690 R8.2@2965,770 ; R8.2 R8.2@2965,770 ; L3.1 3091.69,702.83 3029.96,764.57 2970.43,764.57 R8.2@2965,770
V12-: C13.2 C30.2 D7.2 IC2.2 L2.2 | length 575.2
  Bottom Layer w60: L2.2 3574.34,1310 3587.73,1296.61 3609.49,1296.61 3610,1296.1 D7.2 3610,1290.49 3610.51,1291 3726,1291 IC2.2
V50+: C14.1 J3.5 L4.2 R21.2 | length 2429.1
  Top Layer w15: v1(4005,1645) 4260,1390 v2(4260,1130)
  Top Layer w60: v2(4260,610) v2(4260,1130)
  Bottom Layer w15: v1(4005,1645) 4069.06,1645 R21.2
  Bottom Layer w60: L4.2 3538.15,290 C14.1 3893.15,243.15 v2(4260,610) ; v2(4260,1130) J3.5
V50-: C11.2 J3.7 L1.2 | length 1705.8
  Top Layer w60: v2(3430,1530) v2(3955,1530)
  Bottom Layer w15: 4115.15,1530 4115.15,1540
  Bottom Layer w60: L1.2 2828.31,1512.83 2838.62,1523.15 2851.46,1523.15 2859.88,1531.57 C11.2 3428.43,1531.57 v2(3430,1530) ; v2(3955,1530) 4115.15,1530 4270,1375.15 4313.63,1331.51 4418.49,1331.51 J3.7
VCC: C2.1 C3.1 C6.2 C7.2 C8.2 C9.2 FB1.2 R3.2 TR1.1 TR1.2 Z1.2 | length 837.9
  Top Layer w15: v3(607.4,1080) 970,1080 1150,1260 1150,1320 1190,1360 1220,1360 C3.1
  Bottom Layer w10: R3.2 v3(607.4,1080)
Vin: C20.2 C28.2 D5.1 D8.1 IC1.8 R5.2 | length 1238.7
  Top Layer w10: v3@778.39,806.61 v3(785,800)
  Top Layer w20: v1(380,980) 410,950 635,950 v3@778.39,806.61
  Bottom Layer w10: C20.2 C28.2 ; IC1.8 756.18,769.17 735,790.35 C28.2 ; D8.1 860,463.82 860,725 v3(785,800) C28.2
  Bottom Layer w20: D5.1@310,1006.25 353.75,1006.25 408.37,951.63 408.37,909.03 R5.2
pads on no net: TR1.4

## Polygon pours and split planes (outlines as drawn)
GND on Bottom Layer "GND" (solid, pour order 4): 1710,2100 2000,2100 4640,2100 4640,0 0,0 0,2100
NetD3_2 on Bottom Layer "NONET_L04_P-001" (solid, pour order 3): 1035,770 1015,790 945,790 935,800 935,855 955,875 1075,875 1095,895 1615,895 1645,865 1645,770 1615,740 1065,740
VCC on Bottom Layer "NONET_L04_P-001" (solid, pour order 2): 1230,1160 1264.37,1160 1270,1154.37 1270,1060 1280,1060 1280,1000 1330,950 1670,950 1710,990 1710,1230 1490,1450 1490,1780 1340,1930 1190,1930 1170,1910 1170,1370 1230,1310
NetC1_2 on Bottom Layer "NONET_L04_P-001" (solid, pour order 1): 640,1320 860,1540 860,1750.79 660.79,1750.79 610,1700 374.13,1700 360,1689.4 360,1630 485,1505 485,1405 470,1390 470,1330 480,1320
NetC1_1 on Bottom Layer "NONET_L04_P-001" (solid, pour order 0): 970,1770 970,1690 1110,1690 1110,1925 380,1925 380,1710 660,1710 720,1770
GND on Top Layer "GND_TOP" (solid, pour order 7): 1670,2100 1985,2100 4640,2100 4640,0 0,0 0,2100

## Silkscreen, mask and mechanical layers (free items; w line width, h text height)
Top Overlay:
  lines w10: 50,1840 130,1840 ; 90,1600 90,1680 ; 90,1800 90,1880

## Text inside footprints (layer, text, board x,y; h text height)
C1: Top Overlay "+" at 805,1920 h59.06 r90
C2: Top Overlay "+" at 1320,1570 h59.06 r180
C3: Top Overlay "+" at 1230,1170 h59.06
C10: Top Overlay "+" at 2565,1830 h59.06 r90
C11: Top Overlay "+" at 3095,1910 h59.06 r90
C12: Top Overlay "+" at 2720,1030 h59.06 r270
C13: Top Overlay "+" at 3370,1030 h59.06 r270
C14: Top Overlay "+" at 3770,140 h59.06 r270
C15: Top Overlay "+" at 3260,590 h59.06 r270
C16: Top Overlay "+" at 2810,580 h59.06 r270
C17: Top Overlay "+" at 3160,110 h59.06 r270
C22: Top Overlay "+" at 4060,1510 h59.06 r90
C23: Top Overlay "+" at 4050,1060 h59.06 r90